# EAGLE board commadorable64-28-touch-v1 (EAGLE 6.5.0)
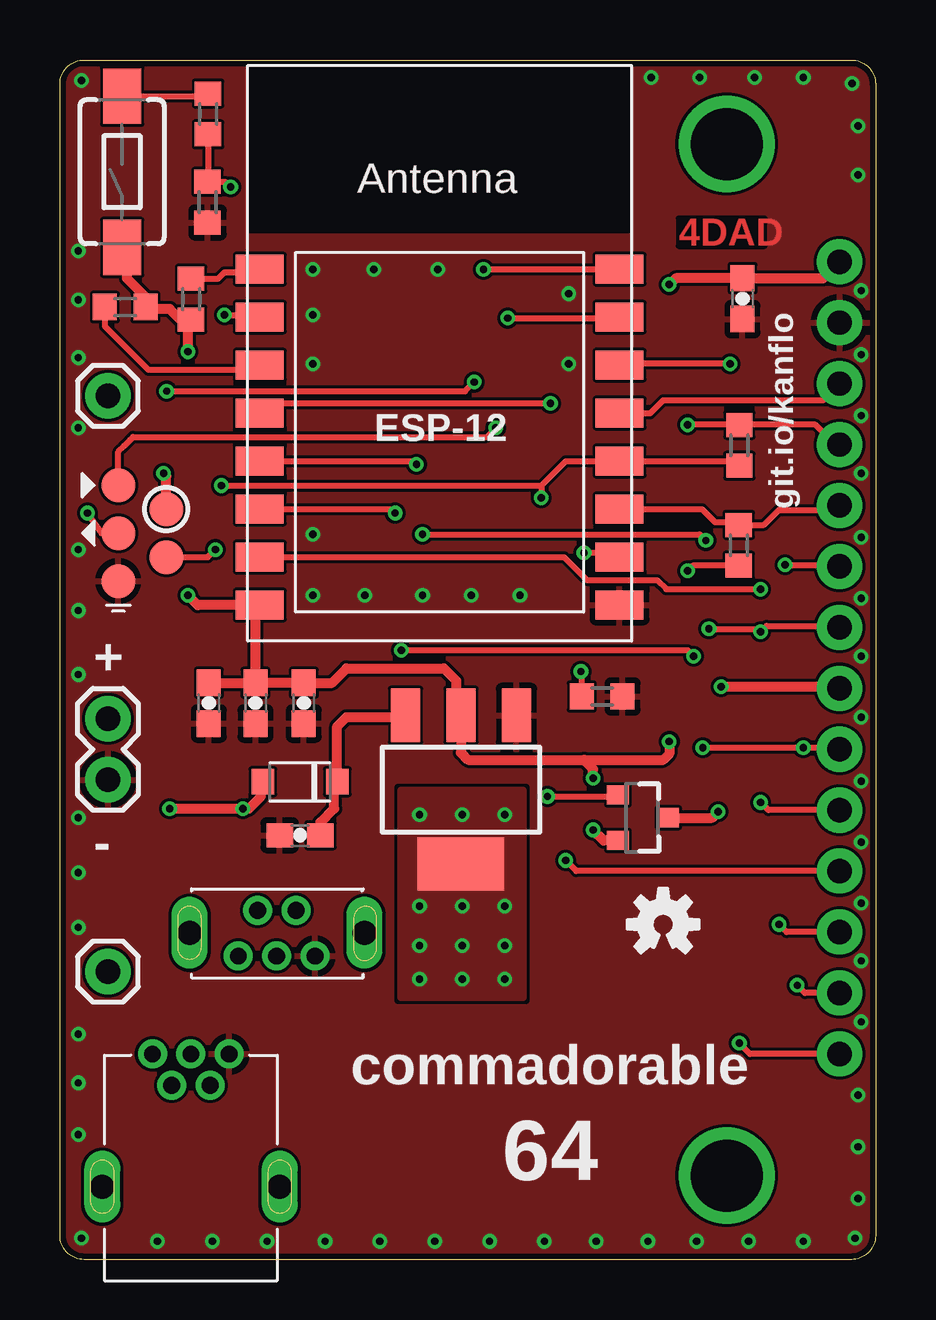
[diagram p0: board, top side]
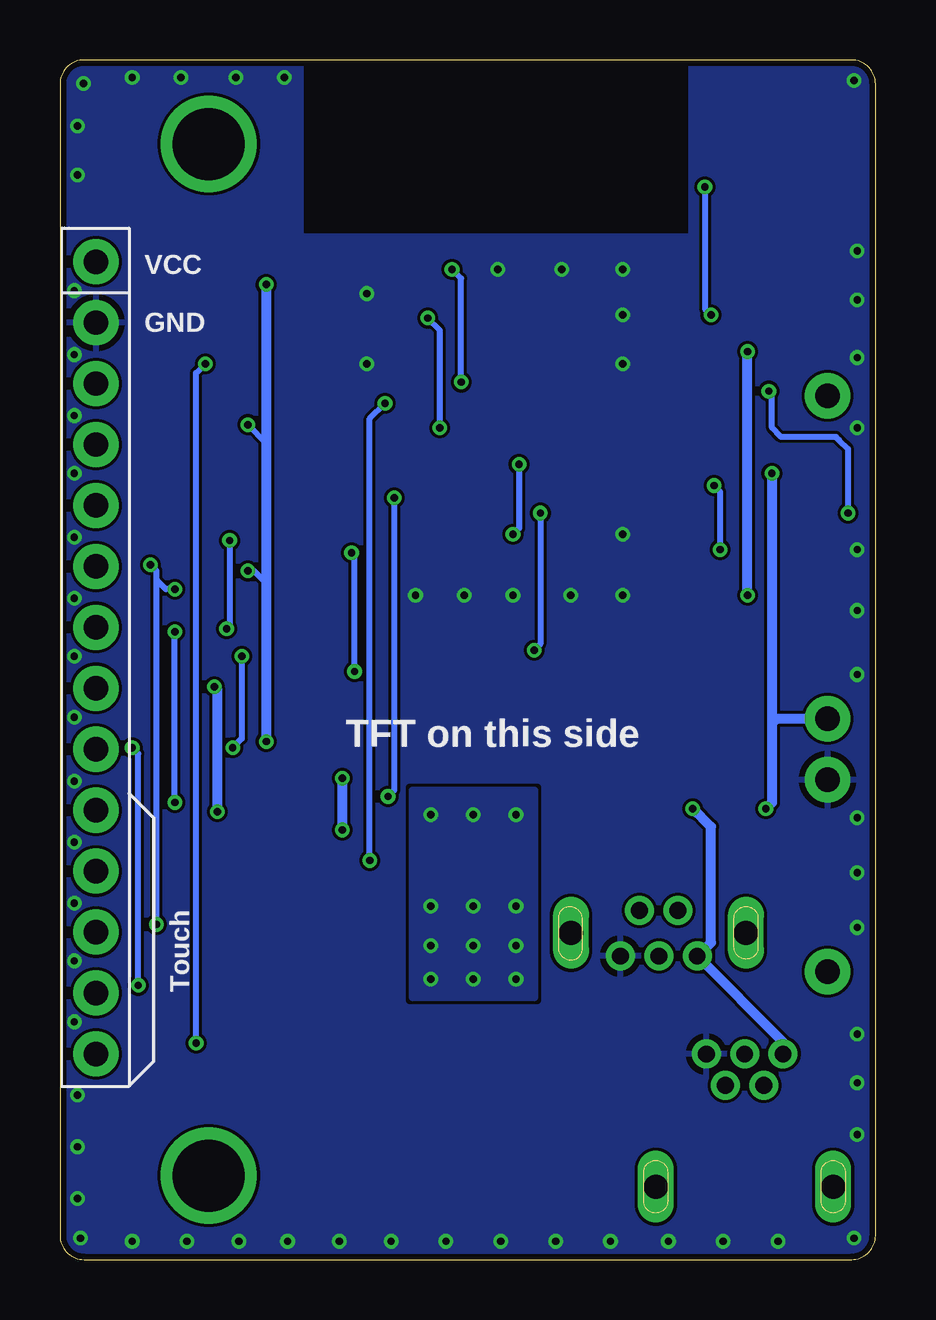
[diagram p1: board, bottom side, seen from below]

Size 34 x 50 mm. Coordinates in mm from the lower left corner, seen from the top.
Outline: 34,49 34,1 arc-90 33,0 1,0 arc-90 0,1 0,49 arc-90 1,50 33,50 arc-90 34,49
Copper layers (1*16): Top 0.035mm / dielectric 1.5mm / Bottom 0.035mm
Design rules "dirt_cheap_dirty_boards.v1": minimum track width 5mil, minimum drill 12mil, track to track 5mil, track to pad 5mil, pad to pad 5mil, via to via 5mil, smd to smd 0mil, copper to edge 10mil, drill to drill 10mil, minimum pad ring 10mil, minimum via ring 6mil, stop-mask expansion 2mil, vias tented up to drill 25mil, thermal gap 10mil

## Footprints (pad centres in the part's own frame; a part is rotated, then mirrored left to right if it is on the bottom)
0603-CAP = smd 1.1 x 1: 1 -0.85,0; 2 0.85,0
SOD-123FL = smd 0.95 x 1.05: A -1.6,0; C 1.5,0
SPI_DISPLAY_TOUCH = drill 1.016 pad 1.88: CS 0,7.62; D/C 0,2.54; GND 0,10.16; LED 0,-5.08; MISO 0,-7.62; MOSI 0,0; RESET 0,5.08; SCK 0,-2.54; T_CS 0,-12.7; T_IRQ 0,-20.32; T_MISO 0,-17.78; T_MOSI 0,-15.24; T_SCK 0,-10.16; VCC 0,12.7
1X02 = drill 1.016 pad 1.88: 1 0,0; 2 2.54,0
1X01 = drill 1.016 pad 1.88: 1 0,0
SOT23-3 = smd 0.8 x 0.9: 1 -0.95,-1; 2 0.95,-1; 3 0,1.1
R0603 = smd 1 x 1.1: 1 -0.85,0; 2 0.85,0
TACTILE-SWITCH-1101NE = smd 2.3 x 1.6: 1 -3.15,0; 2 3.15,0
SOT223 = smd 1.219 x 2.235: 1 -2.311,-3.099; 2 0,-3.099; 3 2.311,-3.099 | smd 3.6 x 2.2: 4 0,3.099
ESP-12E = smd 2 x 1.2: 1 -7.5,4.5; 2 -7.5,2.5; 3 -7.5,0.5; 4 -7.5,-1.5; 5 -7.5,-3.5; 6 -7.5,-5.5; 7 -7.5,-7.5; 8 -7.5,-9.5; 9 7.5,-9.5; 10 7.5,-7.5; 11 7.5,-5.5; 12 7.5,-3.5; 13 7.5,-1.5; 14 7.5,0.5; 15 7.5,2.5; 16 7.5,4.5
MICRO_USB_TH = drill 0.7: D+ -0.11,4.73; D- -0.91,3.43; GND 1.49,4.73; ID 0.69,3.43; VBUS -1.71,4.73 | drill 1 pad 1.5 long: P$1 -3.8,-0.8; P$2 3.6,-0.8
MICRO_USB_TH_VERTICAL = drill 0.7: D+ -0.16,-1.27; D- -0.96,0.63; GND 1.44,-1.27; ID 0.65,0.63; VBUS -1.76,-1.27 | drill 1 pad 1.5 long: P$1 -3.8,-0.3; P$2 3.5,-0.3
ESPROG = smd 1.422 x 1.422: GND -1,-2; GPIO0 1,-1; RXI -1,2; TXO -1,0; VCC 1,1

## Placement (x,y rotation side)
C1  1uF  [0603-CAP]  10.01,17.68 180 top
C2  0.1uF  [0603-CAP]  6.2,23.19 270 top
C3  1uF  [0603-CAP]  8.16,23.19 270 top
C4  10uF  [0603-CAP]  10.16,23.19 270 top
C5  0.1uF  [0603-CAP]  28.45,40.06 270 top
G1  DIODE-SCHOTTKYSOD-123FL  [SOD-123FL]  10.06,19.91 0 top
J1  SPI_TFT_DISPLAY_TOUCH  [SPI_DISPLAY_TOUCH]  32.5,28.89 0 bottom
JP1  [1X02]  2,20 90 top
JP2  [1X01]  2,36 0 top
JP3  [1X01]  2,12 0 top
Q2  MOSFET-PCHANNEL  [SOT23-3]  24.26,18.41 270 top
R1  4k7  [R0603]  5.46,40.03 270 top
R2  4k7  [R0603]  28.32,33.93 90 top
R3  4k7  [R0603]  28.3,29.77 270 top
R4  4k7  [R0603]  2.72,39.7 0 top
R5  4k7  [R0603]  22.61,23.47 0 top
R6  220k  [R0603]  6.17,47.75 90 top
R7  100k  [R0603]  6.15,44.07 90 top
S1  SWITCH-MOMENTARY-2SMD-1101NE  [TACTILE-SWITCH-1101NE]  2.59,45.34 90 top
U1  NCP1117  [SOT223]  16.72,19.58 180 top
U2  [ESP-12E]  15.83,36.78 0 top
U$1  [OSHW-LOGO-S]  25.15,13.97 0 top
X1  MICRO_USB_TH  [MICRO_USB_TH]  5.56,3.84 0 top
X2  MICRO_USB_TH_VERTICAL  [MICRO_USB_TH_VERTICAL]  9.2,13.92 0 top
X3  ESPROGESPROG-DEVICE  [ESPROG]  3.43,30.28 0 top

## Library data of the parts
C1-C5 = SparkFun-Capacitors
G1 J1 U2 X1-X3 = kanflo
JP1-JP3 = SparkFun-Connectors
Q2 = SparkFun-DiscreteSemi; PROD_ID: TRANS-08285
R1-R7 = resistor
S1 = SparkFun-Electromechanical; PROD_ID: SWCH-00815
U1 = ELL-i-PowerIC
U$1 = SparkFun-Aesthetics

## Nets
ADC/USR_BTN: R6.1 R7.2 U2.2
CH_PD: R4.1 U2.3
GND: C1.2 C2.2 C3.2 C4.2 C5.2 J1.GND JP1.1 R5.2 R7.1 U1.1 U2.9 X1.GND X2.GND X3.GND
GPIO0/TFT_BL_EN: Q2.1 R2.1 U2.12 X3.GPIO0
GPIO2/TFT_DC: J1.D/C R3.1 U2.11
GPIO4/TFT_CS: J1.CS U2.13
GPIO5/T_IRQ: J1.T_IRQ U2.14
GPIO12/MISO: J1.MISO J1.T_MISO U2.6
GPIO13/MOSI: J1.MOSI J1.T_MOSI U2.7
GPIO14/SCK: J1.SCK J1.T_SCK U2.5
GPIO15: R5.1 U2.10
GPIO16/T_CS: J1.T_CS U2.4
LED_VCC: J1.LED Q2.3
N$1: C1.1 G1.C U1.3
N$4: R6.2 S1.2
RST: R1.1 U2.1
RXI: U2.15 X3.RXI
TAB: U1.4
TXO: U2.16 X3.TXO
VCC: C2.1 C3.1 C4.1 C5.1 J1.RESET J1.VCC Q2.2 R1.2 R2.2 R3.2 R4.2 S1.1 U1.2 U2.8
VIN: G1.A JP1.2 X1.VBUS X2.VBUS X3.VCC

## Tracks (layer width: path | path; a pad name or v marks a point on that pad's centre or on a via)
ADC/USR_BTN  (via drill 0.3 pad 0.25)
  Top 0.254: R6.1 6.17,44.94 R7.2 6.9,44.92 v7.11,44.7 | v6.86,39.37 8.23,39.37 U2.2
  Bottom 0.254: v7.11,44.7 7.11,39.62 v6.86,39.37
CH_PD
  Top 0.254: R4.1 1.87,38.9 3.68,37.08 8.13,37.08 U2.3
GND  (via drill 0.3 pad 0.25)
  other vias: 24.64,49.28 26.67,49.28 28.96,49.28 30.99,49.28 33.02,49.02 33.28,47.24 33.28,45.21 33.4,40.39 33.4,37.72 33.4,35.18 33.4,32.77 33.4,30.1 33.4,27.56 33.4,25.15 33.4,22.61 33.4,19.94 33.4,17.4 33.4,14.86 33.4,12.45 33.4,9.91 33.28,6.86 33.15,0.89 33.28,2.54 33.28,4.7 30.99,0.76 28.7,0.76 26.55,0.76 24.51,0.76 22.35,0.76 20.2,0.76 17.91,0.76 15.62,0.76 13.34,0.76 11.05,0.76 8.64,0.76 6.35,0.76 4.07,0.76 0.89,0.89 0.76,5.21 0.76,7.37 0.76,9.4 0.76,13.84 0.76,16.13 0.76,18.41 0.76,24.38 0.76,27.05 0.76,29.59 0.76,34.67 0.76,37.59 0.76,40.01 0.76,42.04 0.89,49.15 10.54,27.69 12.7,27.69 19.18,27.69 17.15,27.69 15.11,27.69 10.54,41.27 13.08,41.27 15.75,41.27 10.54,39.37 10.54,37.34 21.21,40.26 21.21,37.34 10.54,30.23
  pour Top (rank 6): 0,50 34,50 34,0 0,0
  pour Bottom (rank 6): 0,50 34,50 34,0 0,0
GPIO0/TFT_BL_EN  (via drill 0.3 pad 0.25)
  Top 0.254: X3.GPIO0 6.16,29.28 v6.48,29.59 | v6.73,32.26 19.94,32.26 20.07,32.26 | U2.12 | U2.12 28.13,33.28 R2.1 | 20.07,32.26 21.08,33.27 U2.12 | U2.12 | 20.07,32.26 v20.07,31.75 | v20.32,19.3 23.2,19.3 Q2.1
  Bottom 0.254: v6.48,29.59 6.48,32 v6.73,32.26 | v20.07,31.75 20.07,19.56 v20.32,19.3
GPIO2/TFT_DC
  Top 0.254: J1.D/C 32.31,31.24 29.97,31.24 29.35,30.62 R3.1 28.18,30.73 27.31,30.73 26.76,31.28 U2.11
GPIO4/TFT_CS
  Top 0.254: U2.13 24.61,35.28 25.15,35.81 31.8,35.81 J1.CS
GPIO5/T_IRQ  (via drill 0.3 pad 0.25)
  Top 0.254: J1.T_IRQ 28.77,8.57 v28.32,9.02 | v27.94,37.34 23.38,37.34 U2.14
  Bottom 0.254: v28.32,9.02 28.32,36.96 v27.94,37.34
GPIO12/MISO  (via drill 0.3 pad 0.25)
  Top 0.254: J1.T_MISO 31.06,11.11 v30.74,11.43 | J1.MISO 32.43,21.34 v30.99,21.34 v26.8,21.34 | U2.6 13.81,31.28 v13.97,31.11 | v14.23,25.4 26.16,25.4 v26.42,25.15
  Bottom 0.254: v30.74,11.43 30.74,21.08 v30.99,21.34 | v13.97,31.11 13.97,25.65 v14.23,25.4 | v26.42,25.15 26.42,21.72 v26.8,21.34
GPIO13/MOSI  (via drill 0.3 pad 0.25)
  Top 0.254: J1.T_MOSI 30.29,13.65 v29.97,13.97 | v30.23,28.96 32.43,28.96 J1.MOSI | U2.7 21.02,29.28 21.97,28.32 24.89,28.32 25.27,27.94 v29.21,27.94
  Bottom 0.254: v29.97,13.97 29.97,28.32 | 29.97,28.32 29.97,28.7 v30.23,28.96 | v29.21,27.94 29.59,27.94 29.97,28.32
GPIO14/SCK  (via drill 0.3 pad 0.25)
  Top 0.254: J1.T_SCK 29.53,18.73 v29.21,19.05 | J1.SCK 32.43,26.42 29.47,26.42 v29.21,26.16 29.09,26.29 v27.05,26.29 | U2.5 14.73,33.28 v14.86,33.15 | v15.11,30.23 26.67,30.23 v26.93,29.97
  Bottom 0.254: v29.21,19.05 v29.21,26.16 | v14.86,33.15 14.86,30.48 14.99,30.35 v15.11,30.23 | v26.93,29.97 26.93,26.42 v27.05,26.29
GPIO15  (via drill 0.3 pad 0.25)
  Top 0.254: R5.1 21.76,24.47 v21.72,24.51 | v21.85,29.46 23.14,29.46 U2.10
  Bottom 0.254: v21.72,24.51 21.72,29.34 v21.85,29.46
GPIO16/T_CS  (via drill 0.3 pad 0.25)
  Top 0.254: J1.T_CS 21.53,16.19 v21.08,16.64 | v20.45,35.69 8.73,35.69 U2.4
  Bottom 0.254: v21.08,16.64 21.08,35.05 v20.45,35.69
LED_VCC  (via drill 0.3 pad 0.25)
  Top 0.406: Q2.3 27.18,18.41 v27.43,18.67 | v27.56,23.88 32.43,23.88 J1.LED
  Bottom 0.406: v27.43,18.67 27.43,23.75 v27.56,23.88
N$1
  Top 0.406: U1.3 14.33,22.61 11.94,22.61 11.56,22.23 G1.C 11.43,19.79 11.43,18.8 10.86,18.22 C1.1
N$2  (via drill 3)
  other vias: 27.8,46.5
N$3  (via drill 3)
  other vias: 27.8,3.5
N$4
  Top 0.254: S1.2 6.06,48.49 R6.2
RST
  Top 0.254: R1.1 6.59,40.88 6.86,41.15 8.2,41.15 U2.1
RXI  (via drill 0.3 pad 0.25)
  Top 0.254: X3.RXI 2.43,33.67 2.67,33.91 2.92,34.16 3.05,34.29 17.78,34.29 v18.16,34.67 | v18.67,39.24 23.29,39.24 U2.15
  Bottom 0.254: v18.16,34.67 18.16,38.73 v18.67,39.24
TAB  (via drill 0.3 pad 0.25)
  other vias: 14.99,14.73 16.77,14.73 18.54,14.73 14.99,13.08 14.99,11.68 16.77,11.68 16.77,13.08 18.54,13.08 18.54,11.68 14.99,18.54 16.77,18.54 18.54,18.54
  pour Top (no thermals): 14.23,19.56 19.31,19.56 19.31,10.92 14.23,10.92
  pour Bottom: 14.23,19.56 19.31,19.56 19.31,10.92 14.23,10.92
TXO  (via drill 0.3 pad 0.25)
  Top 0.254: X3.TXO 1.73,30.28 v1.14,31.11 | v4.45,36.2 16.89,36.2 v17.27,36.58 | v17.66,41.27 U2.16
  Bottom 0.254: v1.14,31.11 1.14,33.78 1.53,34.16 1.65,34.29 3.94,34.29 4.32,34.67 4.32,36.07 v4.45,36.2 | v17.27,36.58 17.27,40.89 v17.66,41.27
VCC  (via drill 0.3 pad 0.25)
  Top 0.254: J1.RESET 32.33,33.97 31.5,34.8 28.34,34.8 | 28.34,34.8 R2.2 | 28.34,34.8 26.42,34.8 v26.16,34.8 | R3.2 26.38,28.92 v26.16,28.7
  Top 0.406: C3.1 8.16,27.11 U2.8 5.74,27.28 v5.34,27.69 | C3.1 C4.1 11.34,24.04 11.94,24.64 16,24.64 16.51,24.13 16.51,22.89 U1.2 16.72,21.13 17.02,20.83 21.85,20.83 | C2.1 C3.1 | 21.85,20.83 25.15,20.83 25.4,21.08 v25.4,21.59 | v5.34,37.85 5.34,39.05 R1.2 5.02,39.18 4.57,39.62 3.65,39.62 R4.2 3.57,40.12 2.8,40.89 2.8,41.66 2.8,41.99 S1.1 | J1.VCC 31.82,40.91 C5.1 25.67,40.91 v25.4,40.64 | Q2.2 22.67,17.46 v22.23,17.91 | v22.23,20.07 22.23,20.45 21.85,20.83
  Bottom 0.254: v26.16,34.8 25.4,34.04 | v26.16,28.7 25.91,28.7 25.4,28.19
  Bottom 0.406: v5.34,27.69 v5.34,37.85 | v25.4,40.64 25.4,34.04 25.4,28.19 v25.4,21.59 | v22.23,17.91 v22.23,20.07
VIN  (via drill 0.3 pad 0.25)
  Top 0.406: G1.A 8.38,19.84 8.38,19.3 7.88,18.8 v7.62,18.8 v4.57,18.8 | X3.VCC 4.43,32.66 v4.32,32.77
  Bottom 0.406: X1.VBUS 3.86,9.07 X2.VBUS 7.42,12.65 6.86,13.21 6.86,18.03 v7.62,18.8 7.44,18.61 | v4.32,32.77 4.32,22.35 | 4.32,22.35 4.32,19.05 v4.57,18.8 | JP1.2 4.13,22.54 4.32,22.35

## Text on the board
Top: 4DAD
tNames: ESP-12 | git.io/kanflo | + | - | commadorable | 64
bNames: VCC | GND | TFT on this side | Touch